# EAGLE board RxBrd (EAGLE 7.2.0)
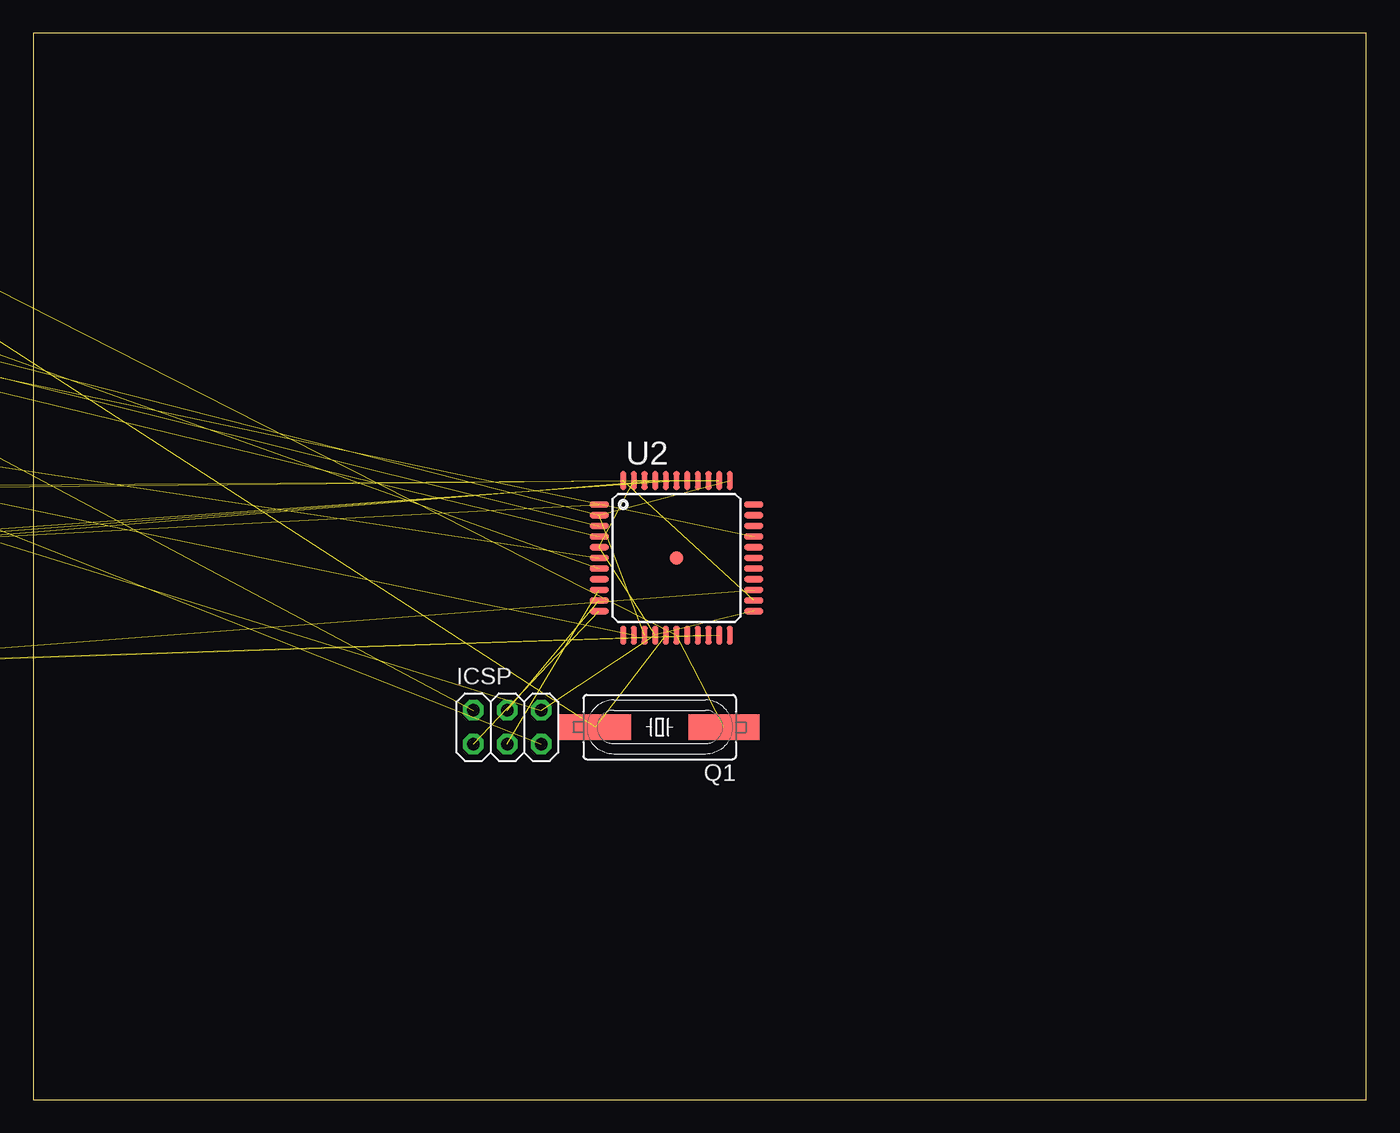
[diagram p0: board, top side]
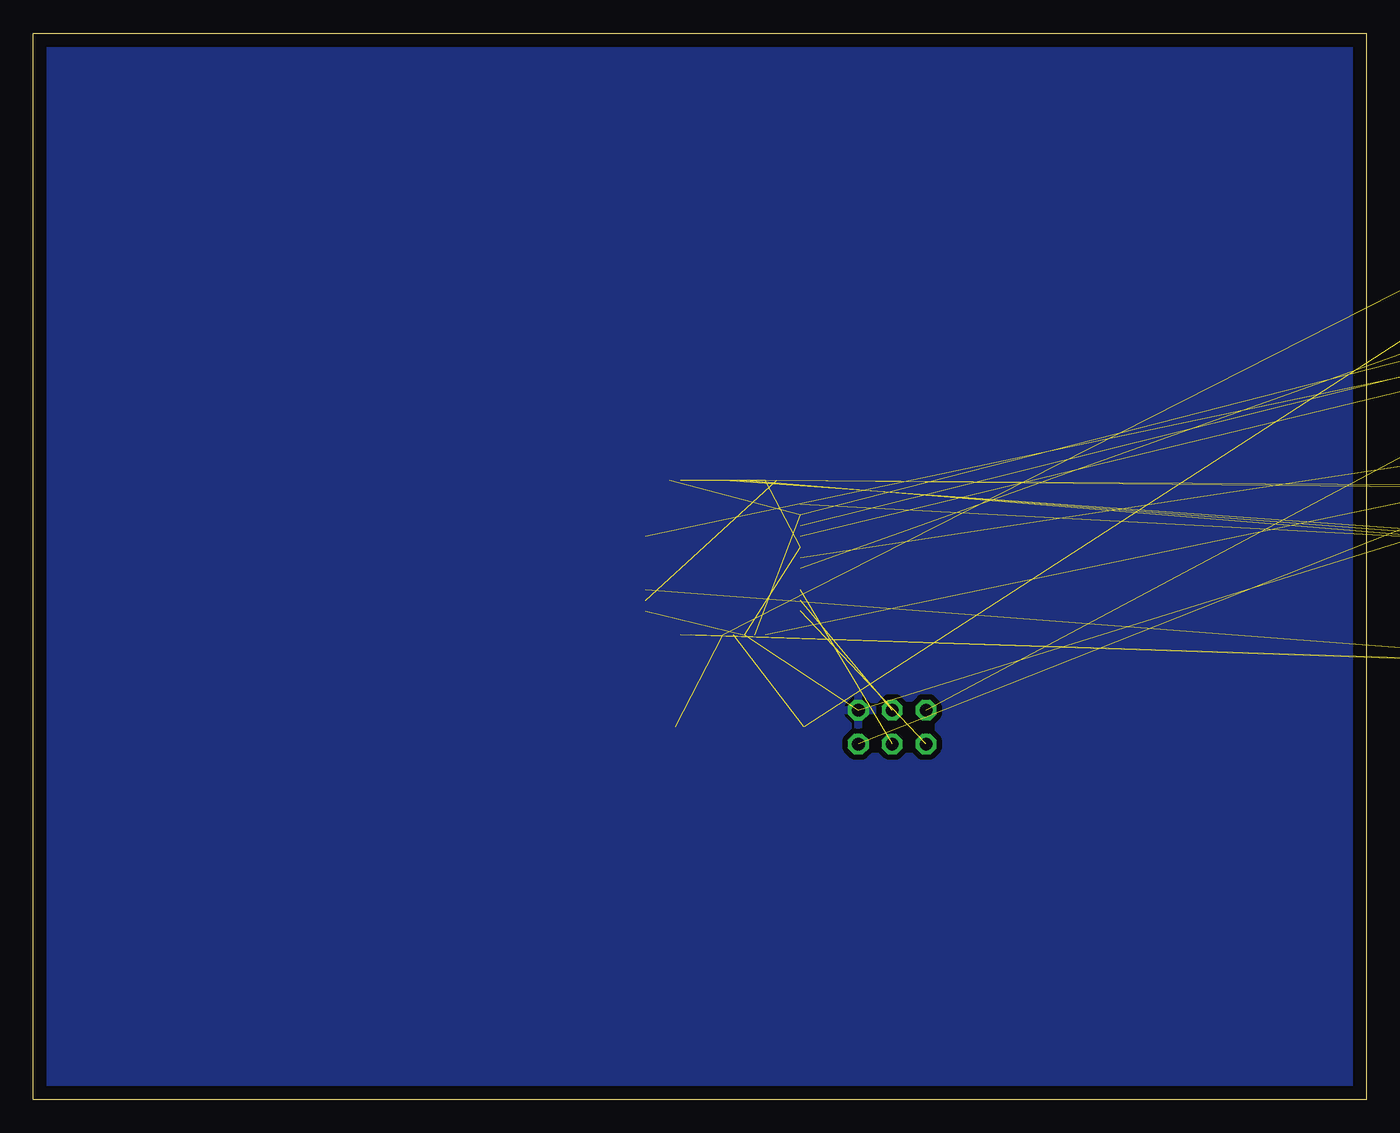
[diagram p1: board, bottom side, seen from below]

Size 100 x 80 mm. Coordinates in mm from the lower left corner, seen from the top.
Outline: 0,0 100,0 100,80 0,80 0,0
Copper layers (1*16): Top 0.035mm / dielectric 1.5mm / Bottom 0.035mm
Design rules "default": minimum track width 10mil, minimum drill 24mil, track to track 8mil, track to pad 8mil, pad to pad 8mil, via to via 8mil, smd to smd 8mil, copper to edge 40mil, drill to drill 8mil, minimum pad ring 10mil, minimum via ring 8mil, stop-mask expansion 4mil, vias tented up to drill 0mil, thermal gap 10mil
Net classes: 0 default: width 0.152 mm, drill 0.305 mm, clearance 0.152 mm; 1 power: width 0.254 mm, drill 0.61 mm, clearance 0.254 mm; 2 gnd: width 0.254 mm, drill 0.61 mm, clearance 0.254 mm; 3 usbvcc: width 0.254 mm, drill 0.61 mm, clearance 0.254 mm; 4 aref: width 0.254 mm, drill 0.61 mm, clearance 0.254 mm

## Footprints (pad centres in the part's own frame; a part is rotated, then mirrored left to right if it is on the bottom)
C0805 = smd 1.3 x 1.5: 1 -0.85,0; 2 0.85,0
SOD123@2 = smd 1.4 x 1.4: A 1.805,0; C -1.805,0
L1812 = smd 1.9 x 3.4: 1 -1.95,0; 2 1.95,0
2X03 = drill 0.95 pad 1.55 octagon: 1 -2.54,-1.27; 2 -2.54,1.27; 3 0,-1.27; 4 0,1.27; 5 2.54,-1.27; 6 2.54,1.27
CON2_USB_MICRO_B_AT = smd 0.406 x 1.346: P1 -1.321,2.692; P2 -0.66,2.692; P3 0,2.692; P4 0.66,2.692; P5 1.321,2.692 | smd 1.651 x 1.549: S1 -3.302,0; S2 3.302,0 | smd 1.524 x 1.016: S3 -2.489,2.692; S4 2.489,2.692 | smd 1.524 x 1.524: S5 -1.016,0; S6 1.016,0 | hole 0.7: -3.505,0.254; -3.505,-0.254; 3.505,0.254; 3.505,-0.254; -2.616,2.692; -2.362,2.692; 2.362,2.692; 2.616,2.692
1X02 = drill 1.016 long: 1 -1.27,0; 2 1.27,0
MMICC7 = drill 0.813 long: 1 -3.81,0; 2 3.81,0
CHIPLED_0805 = smd 1.2 x 1.2: A 0,-1.05; C 0,1.05
HC49UP = smd 5.334 x 1.93: 1 -4.826,0; 2 4.826,0
R0805 = smd 1.3 x 1.5: 1 -0.85,0; 2 0.85,0
TACTILE_SWITCH_SMD = smd 1.524 x 0.762: 1 -2.54,1.905; 2 2.54,1.905; 3 -2.54,-1.905; 4 2.54,-1.905
TQFP44-PAD = smd 1.4 x 0.45: 1 -5.8,4; 2 -5.8,3.2; 3 -5.8,2.4; 4 -5.8,1.6; 5 -5.8,0.8; 6 -5.8,0; 7 -5.8,-0.8; 8 -5.8,-1.6; 9 -5.8,-2.4; 10 -5.8,-3.2; 11 -5.8,-4; 23 5.8,-4; 24 5.8,-3.2; 25 5.8,-2.4; 26 5.8,-1.6; 27 5.8,-0.8; 28 5.8,0; 29 5.8,0.8; 30 5.8,1.6; 31 5.8,2.4; 32 5.8,3.2; 33 5.8,4 | smd 0.45 x 1.4: 12 -4,-5.8; 13 -3.2,-5.8; 14 -2.4,-5.8; 15 -1.6,-5.8; 16 -0.8,-5.8; 17 0,-5.8; 18 0.8,-5.8; 19 1.6,-5.8; 20 2.4,-5.8; 21 3.2,-5.8; 22 4,-5.8; 34 4,5.8; 35 3.2,5.8; 36 2.4,5.8; 37 1.6,5.8; 38 0.8,5.8; 39 0,5.8; 40 -0.8,5.8; 41 -1.6,5.8; 42 -2.4,5.8; 43 -3.2,5.8; 44 -4,5.8 | smd 1 x 1: P$1 0,0
RESONATOR = smd 0.7 x 2: 1 -1,0; 2 0,0; 3 1,0
CT/CN0603 = smd 1 x 1: 1 -1,0; 2 1,0

## Placement (x,y rotation side)
C1  100n  [C0805]  -44.45,45.72 0 top  (outside the outline)
C2  100n  [C0805]  -50.8,45.72 0 top  (outside the outline)
C3  22p  [C0805]  -46.99,52.07 0 top  (outside the outline)
C4  22p  [C0805]  -52.07,52.07 0 top  (outside the outline)
C5  100nF  [C0805]  -25.4,45.72 0 top  (outside the outline)
C6  100n  [C0805]  -57.15,45.72 0 top  (outside the outline)
C7  1uF  [C0805]  -31.75,52.07 0 top  (outside the outline)
C8  10uF  [C0805]  -31.75,45.72 0 top  (outside the outline)
C9  100n  [C0805]  -63.5,45.72 0 top  (outside the outline)
C12  10uF  [C0805]  -38.1,45.72 0 top  (outside the outline)
D1  MBR0540  [SOD123@2]  -29.21,64.77 0 top  (outside the outline)
D2  MBR0540  [SOD123@2]  -35.56,64.77 0 top  (outside the outline)
D3  MBR0540  [SOD123@2]  -41.91,64.77 0 top  (outside the outline)
D4  MBR0540  [SOD123@2]  -48.26,64.77 0 top  (outside the outline)
D5  MBR0540  [SOD123@2]  -54.61,64.77 0 top  (outside the outline)
D6  MBR0540  [SOD123@2]  -60.96,64.77 0 top  (outside the outline)
F1  MF-MSMF050-2 500mA  [L1812]  -31.75,24.13 0 top  (outside the outline)
ICSP  ICSP  [2X03]  35.56,27.94 0 top
J1  USB MICRO  [CON2_USB_MICRO_B_AT]  -21.59,38.1 0 top  (outside the outline)
JP1  Anemometer Connect  [1X02]  -29.21,31.75 0 top  (outside the outline)
JP2  PhotovoltaicCell Connect  [1X02]  -53.34,24.13 0 top  (outside the outline)
JP3  RF Link Connect  [1X02]  -44.45,31.75 0 top  (outside the outline)
JP12  [1X02]  -16.51,45.72 0 top  (outside the outline)
L1  10uH  [MMICC7]  -54.61,31.75 0 top  (outside the outline)
ON  Red  [CHIPLED_0805]  -16.51,69.85 0 top  (outside the outline)
ON1  Green  [CHIPLED_0805]  -41.91,38.1 0 top  (outside the outline)
ON2  Green  [CHIPLED_0805]  -48.26,38.1 0 top  (outside the outline)
ON3  Green  [CHIPLED_0805]  -54.61,38.1 0 top  (outside the outline)
ON4  Green  [CHIPLED_0805]  -60.96,38.1 0 top  (outside the outline)
ON5  Yellow  [CHIPLED_0805]  -29.21,38.1 0 top  (outside the outline)
ON6  Yellow  [CHIPLED_0805]  -35.56,38.1 0 top  (outside the outline)
Q1  [HC49UP]  46.99,27.94 180 top
R1  1M  [R0805]  -57.15,52.07 0 top  (outside the outline)
R2  1k  [R0805]  -62.23,52.07 0 top  (outside the outline)
R3  1k  [R0805]  -15.24,58.42 0 top  (outside the outline)
R4  22  [R0805]  -20.32,58.42 0 top  (outside the outline)
R5  22  [R0805]  -25.4,58.42 0 top  (outside the outline)
R6  51k  [R0805]  -36.83,52.07 0 top  (outside the outline)
R7  1k  [R0805]  -30.48,58.42 0 top  (outside the outline)
R8  10k  [R0805]  -41.91,52.07 0 top  (outside the outline)
R9  1k  [R0805]  -35.56,58.42 0 top  (outside the outline)
R10  1k  [R0805]  -16.51,52.07 0 top  (outside the outline)
R11  1k  [R0805]  -26.67,52.07 0 top  (outside the outline)
R12  1k  [R0805]  -21.59,52.07 0 top  (outside the outline)
S1  RESET  [TACTILE_SWITCH_SMD]  -41.91,58.42 0 top  (outside the outline)
S3  RESET  [TACTILE_SWITCH_SMD]  -49.53,58.42 0 top  (outside the outline)
U2  ATMEGA32U4-XUAU  [TQFP44-PAD]  48.26,40.64 0 top
Y2  16MHz  [RESONATOR]  -21.59,69.85 0 top  (outside the outline)
Z1  CG0603MLC-05E  [CT/CN0603]  -63.5,58.42 0 top  (outside the outline)
Z2  CG0603MLC-05E  [CT/CN0603]  -24.13,64.77 0 top  (outside the outline)

## Library data of the parts
C1-C9 C12 R1-R12 = resistor
D1-D6 = diode
F1 = rcl
ICSP J1 U2 Y2 = SmartPrj
JP1-JP3 JP12 = pinhead
L1 = inductors
ON ON1-ON6 = led
Q1 = crystal; OC_FARNELL: unknown; OC_NEWARK: unknown
S1 S3 = SparkFun
Z1 Z2 = varistor

## Nets
+5V [usbvcc]: C1.1 C2.1 C12.1 D1.C D2.C D3.C D5.C JP1.2 JP12.1 L1.1 R2.2 R3.2 R6.2 R7.2 R9.1 R10.1 R11.1 R12.2 U2.2 U2.14 U2.34
ANEMOMETER_CONNECTED_OK: ON2.C U2.40
AREF [aref]: C6.1 U2.42
AVCC: C5.1 L1.2 U2.24 U2.44
D+: J1.P3 R5.1 Z1.1
D-: J1.P2 R4.1 Z2.1
GND [gnd]: C1.2 C2.2 C3.2 C4.2 C5.2 C6.2 C7.2 C8.2 C9.2 C12.2 D4.A D6.A ICSP.6 J1.P5 J1.S1 J1.S2 J1.S3 J1.S4 J1.S5 J1.S6 JP2.2 JP12.2 ON.C R8.1 S1.1 S1.2 S3.3 S3.4 U2.5 U2.15 U2.23 U2.35 U2.43 Y2.2 Z1.2 Z2.2
MISO: ICSP.1 U2.11
MOSI: ICSP.4 U2.10
N$1: D3.A D4.C JP1.1 U2.25
N$2: ON3.A R7.1
N$3: ON.A R12.1
N$4: D5.A D6.C JP2.1 U2.30
N$5: R6.1 S1.3 S1.4 U2.13
N$6: ON4.A R9.2
N$7: JP3.1 U2.20
N$8: JP3.2 U2.21
N$9: ON2.A R3.1
N$10 [usbvcc]: D2.A ICSP.2
N$11: ON1.A R2.1
N$12: ON5.A R10.2
N$14: ON6.A R11.2
N$23: ICSP.5 S3.1 S3.2
PAD: U2.P$1
PC_CONNECTED_OK: ON1.C U2.41
PHOTOCELL_CONNECTED_OK: ON3.C U2.39
RD+: R5.2 U2.4
RD-: R4.2 U2.3
RF_TRANSCEIVER_CONNECTED_OK: ON4.C U2.1
RX_LED: ON6.C
SCK: ICSP.3 U2.9
TX_LED: ON5.C
UCAP: C7.1 U2.6
USBID: J1.P4
VUSB: C8.1 C9.1 D1.A F1.1 R8.2 U2.7
XTAL1: C4.1 Q1.1 R1.1 U2.17 Y2.3
XTAL2: C3.1 Q1.2 R1.2 U2.16 Y2.1
XUSB [usbvcc]: F1.2 J1.P1

## Tracks (layer width: path | path; a pad name or v marks a point on that pad's centre or on a via)
+5V  (20 unrouted)
ANEMOMETER_CONNECTED_OK  (1 unrouted)
AREF  (1 unrouted)
AVCC  (3 unrouted)
D+  (2 unrouted)
D-  (2 unrouted)
GND  (35 unrouted)
  pour Bottom (isolate 0.406): 0,0 0,100 100,100 100,0
MISO  (1 unrouted)
MOSI  (1 unrouted)
N$1  (3 unrouted)
N$2  (1 unrouted)
N$3  (1 unrouted)
N$4  (3 unrouted)
N$5  (3 unrouted)
N$6  (1 unrouted)
N$7  (1 unrouted)
N$8  (1 unrouted)
N$9  (1 unrouted)
N$10  (1 unrouted)
N$11  (1 unrouted)
N$12  (1 unrouted)
N$14  (1 unrouted)
N$23  (2 unrouted)
PC_CONNECTED_OK  (1 unrouted)
PHOTOCELL_CONNECTED_OK  (1 unrouted)
RD+  (1 unrouted)
RD-  (1 unrouted)
RF_TRANSCEIVER_CONNECTED_OK  (1 unrouted)
SCK  (1 unrouted)
UCAP  (1 unrouted)
VUSB  (5 unrouted)
XTAL1  (4 unrouted)
XTAL2  (4 unrouted)
XUSB  (1 unrouted)